# Altium PCB Steering_Wheel_Board2.PcbDoc
Units mil, origin at the board's own origin, x right, y up, seen from the top; angles counter-clockwise.
Board outline 5320.36 x 2945.22 mil, 2 copper layers (Top Layer, Bottom Layer); 40 components, 35 nets, 200 pads, 60 vias.
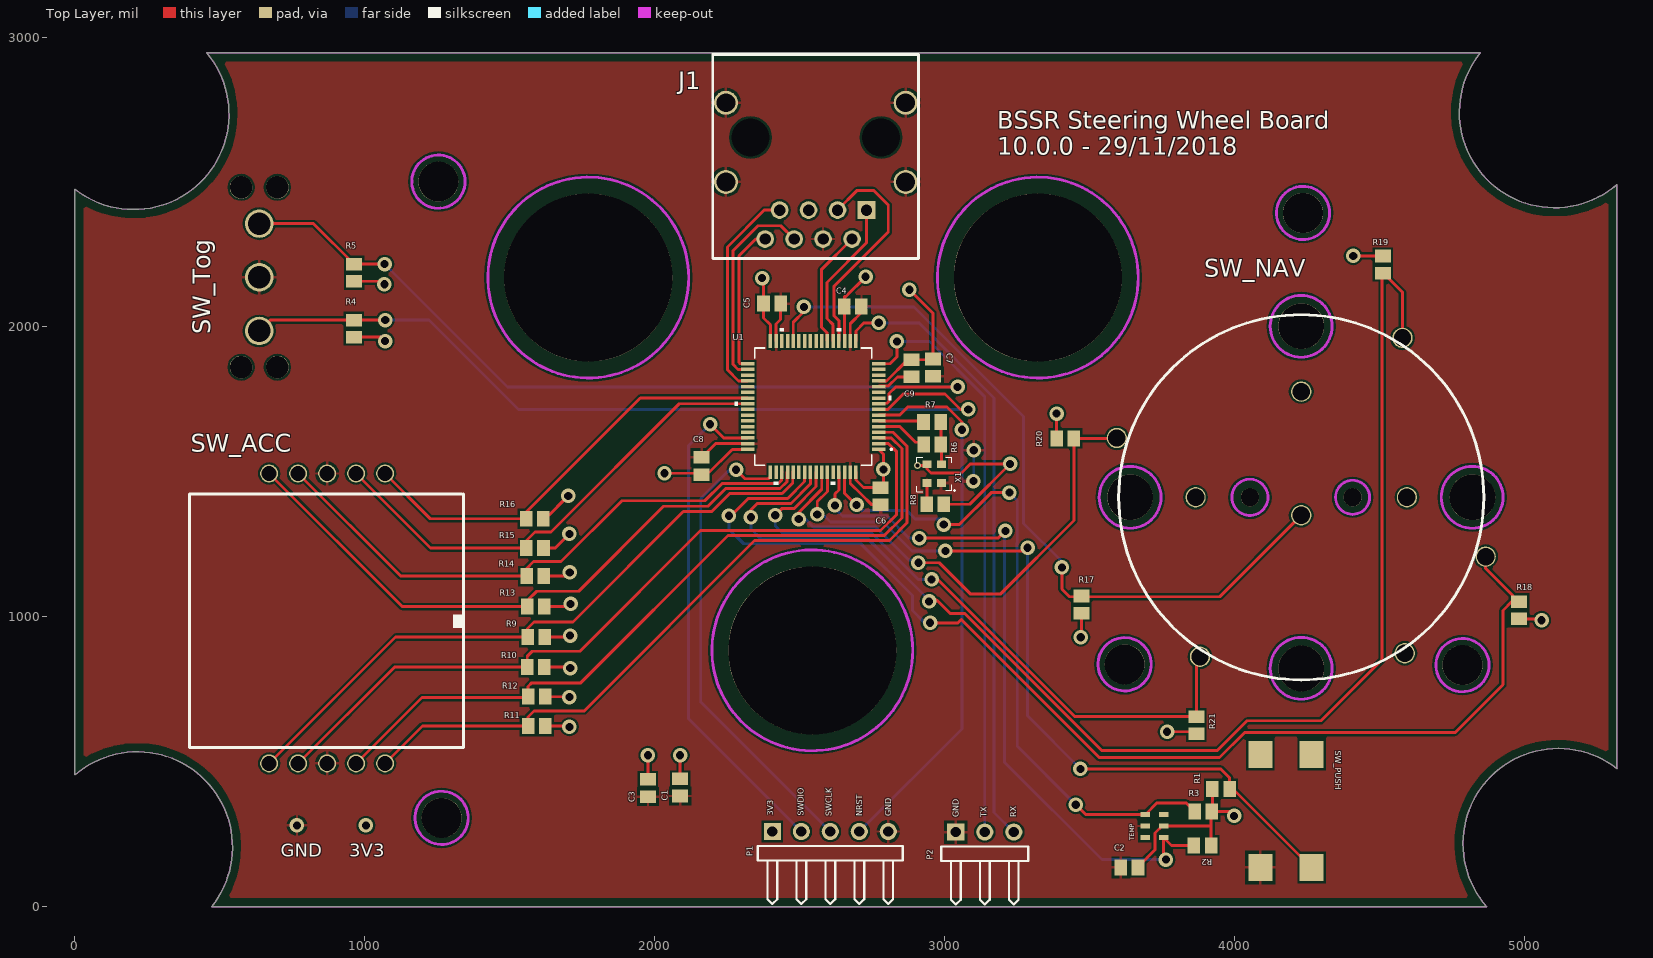
[diagram p0: Top Layer view]
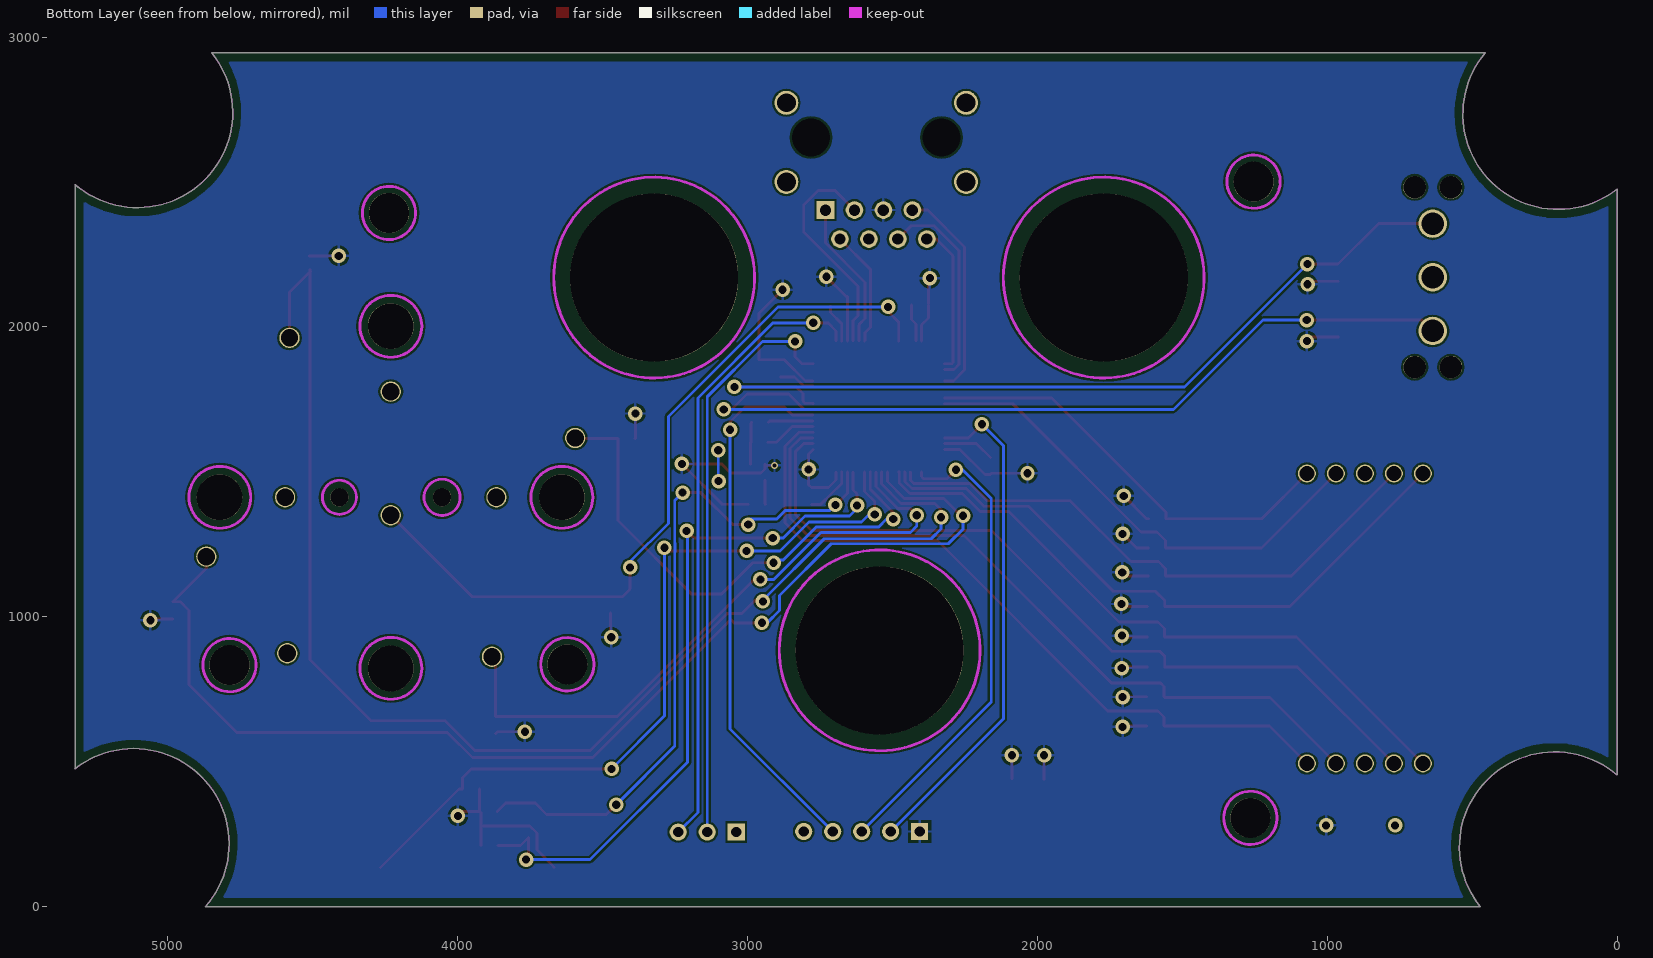
[diagram p1: Bottom Layer view, seen from below]

## Layer stack, top to bottom
Top Solder: solder mask 0.4, Solder Resist, Dk 3.5
Top Layer: signal copper 1.4
Dielectric 1: dielectric 12.6, FR-4, Dk 4.8
Bottom Layer: signal copper 1.4
Bottom Solder: solder mask 0.4, Solder Resist, Dk 3.5

## Board outline
0,454.31 0,2475 ccw(c202.93,2733.74) 454.95,2944.95 455,2945 4848.03,2945 4847.95,2945.06 ccw(c5105,2740) 5319.41,2490.69 5320,2490.69 5320,475 5320.36,475.31 ccw(c5117.43,216.58) 4870,0 471.97,0 471.97,-0.16 ccw(c215,205)

## Design rules (kind name [scope] priority, off if disabled: settings)
BoardOutlineClearance [All] p1: gap=10 ignorepadtopadclearanceinfootprint=FALSE except(0: Arc-SplitContinuation Track-SplitContinuation SMDPad-SplitContinuation THPad-SplitContinuation Via-SplitContinuation Fill-SplitContinuation Poly-SplitContinuation Region-SplitContinuation Text-OutlineEdge Text-SplitContinuation; 30: Poly-OutlineEdge Poly-CutoutEdge)
Clearance [All] p1: gap=7 ignorepadtopadclearanceinfootprint=FALSE
HoleSize [All] p1: absolutevalues=TRUE maxlimit=1500 minlimit=1 maxpercent=80.000 minpercent=20.000
MinimumSolderMaskSliver [All] p1: minsoldermaskwidth=6
PolygonConnect [All] p1: connectstyle=Relief reliefconductorwidth=10 reliefentries=4 polygonreliefangle="90 Angle" airgapwidth=10
RoutingVias [All] p1: holewidth=28 width=50 viastyle="Through Hole" minholewidth=28 minwidth=50 maxholewidth=28 maxwidth=50
SolderMaskExpansion [All] p1: expansion=4
Width [All] p1: maxlimit=10 minlimit=10 preferedwidth=10
28 further rules are at their usual default settings.

## Components (designator, comment, footprint, x,y, rotation, side; value= is the part's Value field where it differs from the comment)
C1 "Cap" C0805 2088,411 r90 top value=0.1µF
C2 "Cap" C0805 3638,135 r0 top value=0.1µF
C3 "Cap" C0805 1977,409 r90 top value=10µF
C4 "Cap" C0805 2684,2071 r180 top value=100nF
C5 "Cap" C0805 2405,2080 r180 top value=100nF
C6 "Cap" C0805 2779.67,1416 r90 top value=100nF
C7 "Cap" C0805 2960,1859.53 r90 top value=1µF
C8 "Cap" C0805 2162,1520 r270 top value=100nF
C9 "Cap" C0805 2886,1857 r90 top value=10nF
J1 "5555153-1" "RJ45 - CHN + DIGIKEY" 2561,2573 r180 top
P1 "Header 5H" HDR1X5H 2406,259 r0 top
P2 "Header 3H" HDR1X3H 3039,257 r0 top
R1 "Res" C0805 3954,406 r0 top value=100k
R2 "Res" C0805 3890,211 r180 top value=10k
R3 "Res" C0805 3893,328 r180 top value=10k
R4 "Res" C0805 962,1994 r90 top value=100k
R5 "Res" C0805 963,2187 r270 top value=100k
R6 "Res" C0805 2958.29,1594 r0 top value=0k
R7 "Res" C0805 2957,1671 r0 top value=0k
R8 "Res" C0805 2968,1388 r0 top value=10k
R9 "Res" C0805 1591,930 r180 top value=100k
R10 "Res" C0805 1590,826 r180 top value=100k
R11 "Res" C0805 1593,623 r0 top value=100k
R12 "Res" C0805 1593,724 r0 top value=100k
R13 "Res" C0805 1590,1035 r0 top value=100k
R14 "Res" C0805 1588,1140 r0 top value=100k
R15 "Res" C0805 1587,1237 r180 top value=100k
R16 "Res" C0805 1586,1338 r180 top value=100k
R17 "Res" C0805 3472,1042 r90 top value=100k
R18 "Res" C0805 4982,1022 r90 top value=100k
R19 "Res" C0805 4512,2215 r270 top value=100k
R20 "Res" C0805 3417,1615 r0 top value=100k
R21 "Res" C0805 3869,626 r90 top value=100k
SW_ACC "EAW0J-B24-CE0128L" EAW0J-B24-CE0128L 1070,1494 r180 top (schematic designator EAW1)
SW_NAV "Comment" TSWB3NCB222LFS 4230.83,1412 r0 top
SW_PUSH "K12SCS1.55NOLFTX" Pushbutton 4177.99,329.88 r0 top (schematic designator K1)
SW_Tog "SW-SPDT" 3POSSPDT 636,2171 r0 top (schematic designator S1)
TEMP "Temp_Sensor" Temp_Sensor 3724.5,278 r0 top (schematic designator 1)
U1 "STM32L4x6RxT6" LQFP64-10x10mm 2547,1725 r180 top value=Value
X1 "DSC6011" DSC6011JE1A-020.0000TCT-ND 3024.61,1435.65 r90 top (schematic designator DSC1)

## Footprints (in the part's own frame and the unit in brackets; to place one, negate y for a bottom-side part, rotate by r counter-clockwise, add the part's x,y. Pads: shape width x height; smd on the part's side, far side on the other; paste and mask are expansions set on the pad)
3POSSPDT [mil] "100SP3T2B4M2QE-ND"
  round 98 hole 78: 1(0,185.04) 2(0,0) 3(0,-185.04)
  round 78 hole 78: ""(-62.6,310.04) ""(-62.6,-310.04) ""(62.6,-310.04) ""(62.6,310.04)
C0805 [mm] "Chip Capacitor, Body 2.0x1.3mm, IPC High Density"
  rect 1.1x1.4 smd: 1(-0.75,0) 2(0.75,0)
  body extent -1.1,-0.72 1.1,0.72, height 1.4
DSC6011JE1A-020.0000TCT-ND [mm] "4-Lead Very Thin Land Grid Array (AUA) - 2.5x2.0 mm Body [VLGA]"
  rect 0.7x0.8 smd: 1(0.645,2.149) 2(0.645,0.899) 3(2.295,0.899) 4(2.295,2.149)
  silkscreen extent -0.13,-0.25 2.92,3.05, body extent 0.27,0.27 2.67,2.77, height 0.89
EAW0J-B24-CE0128L [mil] "ROTARY ENCODER MECHANICAL 128PPR"
  round 62 hole 52: 1(0,0) 2(100,0) 3(300,0) 4(400,0) 5(400,1000) 6(300,1000) 7(100,1000) 8(0,1000) C(200,1000) C(200,0)
  silkscreen extent -270,70 675,945
HDR1X3H [mm] "Connector; Header; 3 Position; Right Angle"
  rect 1.5x1.5 hole 0.9: 1(0,0)
  round 1.5 hole 0.9: 2(2.54,0) 3(5.08,0)
  silkscreen extent -1.27,-6.35 6.35,-1.27
HDR1X5H [mm] "Connector; Header; 5 Position; Right Angle"
  rect 1.5x1.5 hole 0.9: 1(0,0)
  round 1.5 hole 0.9: 2(2.54,0) 3(5.08,0) 4(7.62,0) 5(10.16,0)
  silkscreen extent -1.27,-6.35 11.43,-1.27
LQFP64-10x10mm [mil]
  rect 47x12 smd paste+0 mask+0: 1(-226.38,147.64) 2(-226.38,127.95) 3(-226.38,108.27) 4(-226.38,88.58) 5(-226.38,68.9) 6(-226.38,49.21) 7(-226.38,29.53) 8(-226.38,9.84) 9(-226.38,-9.84) 10(-226.38,-29.53) 11(-226.38,-49.21) 12(-226.38,-68.9) 13(-226.38,-88.58) 14(-226.38,-108.27) 15(-226.38,-127.95) 16(-226.38,-147.64) 33(226.38,-147.64) 34(226.38,-127.95) 35(226.38,-108.27) 36(226.38,-88.58) 37(226.38,-68.9) 38(226.38,-49.21) 39(226.38,-29.53) 40(226.38,-9.84) 41(226.38,9.84) 42(226.38,29.53) 43(226.38,49.21) 44(226.38,68.9) 45(226.38,88.58) 46(226.38,108.27) 47(226.38,127.95) 48(226.38,147.64)
  rect 12x47 smd paste+0 mask+0: 17(-147.64,-226.38) 18(-127.95,-226.38) 19(-108.27,-226.38) 20(-88.58,-226.38) 21(-68.9,-226.38) 22(-49.21,-226.38) 23(-29.53,-226.38) 24(-9.84,-226.38) 25(9.84,-226.38) 26(29.53,-226.38) 27(49.21,-226.38) 28(68.9,-226.38) 29(88.58,-226.38) 30(108.27,-226.38) 31(127.95,-226.38) 32(147.64,-226.38) 49(147.64,226.38) 50(127.95,226.38) 51(108.27,226.38) 52(88.58,226.38) 53(68.9,226.38) 54(49.21,226.38) 55(29.53,226.38) 56(9.84,226.38) 57(-9.84,226.38) 58(-29.53,226.38) 59(-49.21,226.38) 60(-68.9,226.38) 61(-88.58,226.38) 62(-108.27,226.38) 63(-127.95,226.38) 64(-147.64,226.38)
  silkscreen extent -273,-270 270,270, body extent 0,0 10,10, height 10
Pushbutton [mm] "K12SCS1.55NOLFTX"
  rect 2.1x2.4 smd: 1(-2.25,-4.95) 2(2.25,-4.95) 3(2.25,4.95) 4(-2.25,4.95)
"RJ45 - CHN + DIGIKEY" [mm]
  rect 1.55x1.55 hole 1: 1(-4.318,4.318)
  round 1.55 hole 1: 2(-3.048,6.858) 3(-1.778,4.318) 4(-0.508,6.858) 5(0.762,4.318) 6(2.032,6.858) 7(3.302,4.318) 8(4.572,6.858)
  round 2.1 hole 1.65: 11(-7.747,-5.08) 11(-7.747,1.854) 12(8.001,-5.08) 12(8.001,1.854)
  round 1.524 hole 3.35: ""(-5.588,-2.032) ""(5.842,-2.032)
  silkscreen extent -8.87,-9.32 9.16,8.57
Temp_Sensor [mm] "Si7000-A20 Temperature and Humidity Sensor"
  rect 0.85x0.45 smd: 1(-0.8,1) 2(-0.8,0) 3(-0.8,-1) 4(0.8,1) 5(0.8,0) 6(0.8,-1)
TSWB3NCB222LFS [mm] "SWITCH NAVIGATION SCROLL"
  round 1.778 hole 1.524: 1(0,-1.57) 2(16.16,-5.2) 3(8.87,13.97) 4(-16.16,5.2) 5(-8.87,-13.97) 11(-9.26,0) 12(9.07,-13.67) 21(9.26,0) 22(0,9.26)
  round 4 hole 4: ""(-15,0) ""(0,-15) ""(0,15) ""(15,0)
  round 1.6 hole 1.6: ""(-4.5,0) ""(4.5,0)
  Keep-Out Layer circle w0.254: c-4.5,0 r1.584
  Keep-Out Layer circle w0.254: c4.5,0 r1.491
  Keep-Out Layer circle w0.254: c-0.014,-14.986 r2.709
  Keep-Out Layer circle w0.254: c14.972,0 r2.709
  Keep-Out Layer circle w0.254: c-0.014,14.986 r2.709
  Keep-Out Layer circle w0.254: c-15,0 r2.709
  silkscreen extent -16,-16 16,16

## Part data
C1 C2 C3 C4 C5 C6 C7 C8 C9: "Capacitor", LatestRevisionDate=17-Jul-2002, LatestRevisionNote="Re-released for DXP Platform.", PackageReference=RAD-0.3, Published=8-Jun-2000, Publisher="Altium Limited"
J1: library part CMP-2000-05640-1, "RJ45 Connector, Pitch 1.27 mm, 8 Position, Height 13.08 mm, Tail Length 3.81 mm, -40 to 85 degC, RoHS, Tray", LED Color=DoesNotContainLED, Manufacturer="TE Connectivity", Operating Temperature=-40°C~85°C, Package Description="RJ45 Connector, Pitch 1.27 mm, 8 Position, Height 13.08 mm, Tail Length 3.81 mm", Ratings=Cat3, Standard Package=136, 3D Model=5555153-1.pdf, Catalog Drawings="JackSideEntryRightAngle /  / JackSideEntryRightAngleTop", Category=Connectors,Interconnects, Connector Type=Jack, Contact Finish=Gold, Contact Finish Thickness=50µin(1.27µm), Contact Material=PhosphorBronze, Datasheet URL=http://www.te.com/commerce/DocumentDelivery/DDEController?Action=srchrtrv&DocNm=5555153&DocType=Customer+Drawing&DocLang=English&DocFormat=pdf&PartCntxt=5555153-1, Datasheet Version="Rev. D2, 05/2016", Dynamic Catalog=ModularJacks, Family=ModularConnectors-Jacks, Features=BoardLock,PanelStops, Housing Material=PolybutyleneTerephthalate(PBT),Polyester, Manufacturer URL=http://www.te.com/, Mounting Technology=ThroughHole, Mounting Type=ThroughHole, Number of Ports=1, Number of Positions/Contacts=8p8c(RJ45,Ethernet), Number of Rows=1, Orientation=90°Angle(Right), Other Names=A31438, Package Reference=5555153-1, Packaging=Tray, RoHS Information=5555153-1StatementofCompliance, Shielding=Shielded, Tab Direction=Down, Termination=Solder
P1: "Header, 5-Pin, Right Angle", LatestRevisionDate=17-Jul-2002, LatestRevisionNote="Re-released for DXP Platform.", Publisher="Altium Limited"
P2: "Header, 3-Pin, Right Angle", LatestRevisionDate=17-Jul-2002, LatestRevisionNote="Re-released for DXP Platform.", Publisher="Altium Limited"
R1 R4 R5 R6 R7 R9 R10 R11 R12 R13 R14 R15 R16 R17 R18 R19 R20 R21: "Rectangular Thick Film Chip Resistor, 10 Ohm to 1M Ohm Range, 0.1% and 0.5% Tolerance, 0805 Size, 0.1 W", PackageDocument=Mar-2003, Code_IPC="2012 [0805]", ComponentLink1Description="Manufacturer Link", ComponentLink1URL=http://www.panasonic.com/industrial/components/resistive_products.htm, ComponentLink2Description=Datasheet, ComponentLink2URL=http://www.panasonic.com/industrial/components/pdf/AOA0000CE8.pdf, LatestRevisionDate=19-Mar-2004, LatestRevisionNote="Silkscreen size reduced.", Note="If flow soldering, adjust pad width of PCB Footprint to 0.7 - 0.8 times the width of the resistor.", PackageReference=ERA-0805, Published=17-Dec-2003, Publisher="Altium Limited"
R2 R3 R8: PackageDocument=Mar-2003, Code_IPC="2012 [0805]", LatestRevisionDate=19-Mar-2004, LatestRevisionNote="Silkscreen size reduced.", Note="If flow soldering, adjust pad width of PCB Footprint to 0.7 - 0.8 times the width of the resistor.", PackageReference=ERA-0805, Published=17-Dec-2003, Publisher="Altium Limited"
SW_ACC: "Rotary Encoder - 8 pins"
SW_PUSH: library part Pushbutton, "Pushbutton"
SW_Tog: "SPDT Subminiature Toggle Switch, Right Angle Mounting, Vertical Actuation", ComponentLink1Description="Manufacturer Link", ComponentLink1URL=http://www.apem.com, DatasheetVersion=05-Dec-2000, LatestRevisionDate=17-Dec-2003, LatestRevisionNote="Schematic revised, PCB Footprint replaced.", PackageDescription="Switch; 4 Leads", PackageReference=TL36WW15050, Published=24-Mar-1999, Publisher="Altium Limited"
TEMP: "Si7000-A20 Temperature and Humidity Sensor"
U1: "Imported", Manufacturer_Part_Number=stm32l4x6rxt6, C="Copyright (C) 2016 Accelerated Designs. All rights reserved", Copyright="Copyright (C) 2016 Accelerated Designs. All rights reserved", RefDes=RefDes, Type=DEV, Vendor=STMicroelectronics

## Free pads (board coordinates)
  round 580 hole 580: 1(1771,2170) 2(2544,884) 3(3322,2170)
  round 138 hole 138: ""(1254,2501) ""(1265,306) ""(3621.53,836) ""(4237,2393) ""(4787,833)

## Via types
v1: diameter 50, hole 28, Top Layer to Bottom Layer, 59 vias
v2: diameter 25, hole 14, Top Layer to Bottom Layer, 1 vias

## Nets (pads, with @x,y where several pads share a name; then routed paths per layer and width w, separated by ;. In a path a pad name is that pad's centre, name@x,y a point inside that pad or via, vN(x,y) a via of type N, cw(c..) or ccw(c..) an arc to the next point about the centre after c; other vN are vias at no path point)
3V3: C1.2 C2.2 C3.2 C4.2 C5.2 C6.2 C7.2 C8.2 C9.2 J1.5 P1.1 R1.1 R2.1 R3.1 R4.1 R5.2 R8.2 R9.1 R10.1 R11.2 R12.2 R13.2 R14.2 R15.1 R16.1 R17.1 R18.1 R19.1 R20.1 R21.1 TEMP.5 U1.1 U1.13 U1.19 U1.32 U1.48 U1.64 X1.4 | length 4435.5
  Top Layer w10: R4.1 1056.53,1964.47 v1(1070,1951) ; R5.2 1057.53,2157.47 v1(1068,2147) ; R16.1 1623,1338 v1(1702,1417) ; R15.1 1657,1237 v1(1706,1286) ; R14.2 1694,1140 v1(1707,1153) ; R10.1 1706,826 v1(1709,823) ; R13.2 1701,1035 v1(1710,1044) ; R9.1 1703,930 v1(1708,935) ; R11.2 1703,623 v1(1706,620) ; R12.2 1705,724 v1(1706,723) ; C3.2 v1(1977,522) ; v1(2034,1495) 2157.47,1495 C8.2 2181.11,1490.47 2268,1577.36 U1.48 ; C1.2 v1(2088,522) ; v1(2371,2168) 2375.47,2163.53 C5.2 ; C5.2@2375.47,2075 2375.47,2030.89 2399.36,2007 U1.32 ; U1.19 C4.2 2654.47,2104.47 2659.47,2104.47 v1(2728,2173) ; U1.64 2694.64,1471.89 2721,1445.53 C6.2 2789,1454.86 v1(2789,1508) 2789,1561.74 U1.1 ; U1.13 2800.16,1813.58 2873.11,1886.53 C9.2 C7.2@2960,1886.53 ; v1(2879,2128) 2960,2047 C7.2 ; v2(2907,1522) 2936,1522 X1.4 2940,1510 2953.83,1496.17 3058.17,1496.17 3089,1527 v1(3226,1527) 3087,1388 R8.2 ; v1(3387,1701) 3387,1615.47 R20.1 ; v1(3470,929) 3472,931 R17.1 ; C2.2 3667.53,137 3726.53,196 3726.53,253.53 3751,278 TEMP.5 3918.53,278 3919.53,277 ; v1(3768,603) 3862.47,603 R21.1 ; R2.1 3919.53,277 ; R1.1 3924.47,329.94 R3.1 ; v1(3999,313) 3984,328 R3.1 ; v1(4410,2245) 4511.53,2245 R19.1 ; R18.1 5055.53,992.47 v1(5060,988) ; 3919.53,277 3919.53,325 R3.1
  other v1: 1004,280
ACC1: R16.2 SW_ACC.1 U1.39 | length 1500.9
  Top Layer w10: SW_ACC.1 1226,1338 R16.2 1556.47,1360.47 1950.53,1754.53 U1.39
ACC2: R15.2 SW_ACC.2 U1.40 | length 1678.2
  Top Layer w10: SW_ACC.2 1227,1237 R15.2 1557.47,1262.47 1587,1292 1642,1292 2084.84,1734.84 U1.40
ACC3: R14.1 SW_ACC.3 U1.51 | length 1995.1
  Top Layer w10: SW_ACC.3 1124,1140 R14.1 1558.47,1166.47 1582,1190 1677,1190 1887,1400 2173,1400 2232,1459 2425.9,1459 2437.05,1470.15 2437.05,1496.94 U1.51
ACC4: R13.1 SW_ACC.4 U1.52 | length 2201.8
  Top Layer w10: SW_ACC.4 1129,1035 R13.1 1560.47,1055.47 1593,1088 1738,1088 2031,1381 2184,1381 2245,1442 2432.94,1442 2456.73,1465.8 2456.73,1498.62 U1.52
ACC5: R9.2 SW_ACC.5 U1.53 | length 2263.3
  Top Layer w10: SW_ACC.5 1106,930 R9.2 1561.47,959.47 1584,982 1718,982 2099,1363 2197,1363 2259,1425 2439.98,1425 2476.42,1461.44 2476.42,1498.62 U1.53
ACC6: R10.2 SW_ACC.6 U1.2 | length 2732.1
  Top Layer w10: SW_ACC.6 1102,826 R10.2 1560.47,863.47 1578,881 1742,881 2158,1297 2779.2,1297 2835,1352.8 2835,1569 2806.95,1597.05 U1.2
ACC7: R12.1 SW_ACC.7 U1.3 | length 2588.5
  Top Layer w10: SW_ACC.7 1197,721 1560.47,721 R12.1 1563.47,759.47 1576,772 1745,772 2253,1280 2792,1280 2853,1341 2853,1580 2816.27,1616.73 U1.3
ACC8: R11.1 SW_ACC.8 U1.4 | length 2544.9
  Top Layer w10: SW_ACC.8 1199,623 R11.1 1563.47,654.47 1584,675 1757,675 2345,1263 2810,1263 2871,1324 2871,1588 2822.58,1636.42 U1.4
CS1: J1.3 U1.20 | length 777.2
  Top Layer w10: J1.3 2699,2471 2755,2471 2806,2420 2806,2327 2619,2140 2619,2038 2635.58,2021.42 U1.20
CS2: J1.8 U1.33 | length 513.5
  Top Layer w10: U1.33 2295.36,1872.64 2291,1877 2291,2245 2349,2303 J1.8
GND: C1.1 C2.1 C3.1 C4.1 C5.1 C6.1 C7.1 C8.1 C9.1 J1.4 J1.11 J1.12 P1.5 P2.1 SW_ACC.C SW_PUSH.1 SW_Tog.2 TEMP.2 U1.12 U1.18 U1.31 U1.47 U1.63 X1.2 | length 851.4
  Top Layer w10: C8.1 2209.52,1597.05 U1.47 ; U1.31 2419.05,2010.05 2434.53,2025.53 C5.1@2434.53,2075 ; U1.63 2674.95,1460.05 2712,1423 2712.33,1423 2748.85,1386.47 C6.1 ; U1.18 2674.95,2011 2713.53,2049.57 C4.1 ; U1.12 2775.06,1795.58 2806.2,1795.58 2838.09,1827.47 C9.1
  Bottom Layer w10: v1(3100,1467.65) 3101,1468.65 v1(3101,1574.36)
  other v1: 766,280
L_SIGNAL: R4.2 SW_Tog.3 U1.8 | length 2941.8
  Top Layer w10: SW_Tog.3 673.57,2023.53 R4.2 v1(1070.53,2023.53) ; U1.8 2804.52,1715.16 2857.36,1768 3002,1768 3055,1715 v1(3082,1715)
  Bottom Layer w10: v1(1070.53,2023.53) 1221.47,2023.53 1530,1715 v1(3082,1715)
NAV1: R17.2 SW_NAV.1 U1.28 | length 2651.2
  Top Layer w10: U1.28 2478.1,2016.1 2515,2053 v1(2515,2069) ; v1(3405,1170) 3405,1095 3431,1069 3949.65,1069 SW_NAV.1
  Bottom Layer w10: v1(2515,2069) 2895,2069 3273,1691 3273,1322 3405,1190 v1(3405,1170)
NAV2: R18.2 SW_NAV.2 U1.55 | length 4056.4
  Top Layer w10: v1(2256,1348.44) 2263.44,1348.44 2323,1408 2459,1408 2517.47,1466.47 U1.55 ; v1(2950,979) 3047,979 3058,990 3534,514 3949,514 4035,600 4761,600 4926.53,765.53 4926.53,1021.68 4956.38,1051.53 R18.2 4867.06,1166.47 SW_NAV.2
  Bottom Layer w10: v1(2256,1348.44) 2256,1303 2307.1,1251.9 2711.1,1251.9 2890,1073 2890,1021 2932,979 v1(2950,979)
NAV3: R19.2 SW_NAV.3 U1.56 | length 4584.3
  Top Layer w10: v1(2332,1343) 2332,1369 2354,1391 2470,1391 2537.16,1458.16 U1.56 U1.56@2537,1498.46 ; v1(2946.82,1053) 2968,1053 2973,1058 3020,1011 3069.96,1011 3541.96,539 3942,539 4044,641 4298.62,641 4510,852.38 R19.2@4510,2189.53 ; R19.2@4507.53,2192 R19.2@4510,2189.53 ; R19.2@4510,2197 R19.2@4510,2189.53 ; SW_NAV.3 4580.05,2119.48 R19.2@4510,2189.53
  Bottom Layer w10: v1(2332,1343) 2332,1303 2366.1,1268.9 2735.1,1268.9 2946.82,1057.18 v1(2946.82,1053)
NAV4: R21.2 SW_NAV.5 U1.57 | length 2205.6
  Top Layer w10: v1(2416,1350) 2440,1374 2482,1374 2556.84,1448.84 U1.57 ; v1(2955.18,1129) 2976,1129 3449.47,655.53 R21.2 3869,849.38 SW_NAV.5
  Bottom Layer w10: v1(2416,1350) 2416,1313 2438,1291 2747,1291 2909,1129 v1(2955.18,1129)
NAV5: R20.2 SW_NAV.4 U1.58 | length 1787.8
  Top Layer w10: v1(2497,1337) 2497,1360 2576.53,1439.53 U1.58 ; v1(2910,1186.14) 2981.86,1186.14 3089,1079 3194,1079 3446.53,1331.53 R20.2 3592.89,1615 SW_NAV.4
  Bottom Layer w10: v1(2497,1337) 2520,1337 2547,1310 2763,1310 2878,1195 2901.14,1195 v1(2910,1186.14)
Net1_1: R3.2 TEMP.1 U1.62 | length 2365.2
  Top Layer w10: U1.62 2655.27,1425.73 2695,1386 v1(2697,1386) ; v1(2997.56,1318) 3051,1318 3161,1428 v1(3224,1428) ; v1(3453,351.47) 3487.1,317.37 TEMP.1 3733.63,358 3833.47,358 R3.2
  Bottom Layer w10: v1(2697,1386) 2716,1367 2869,1367 2899,1337 2990,1337 2997.56,1329.44 v1(2997.56,1318) ; v1(3224,1428) 3250.84,1401.16 3250.84,1254.16 ; v1(3453,351.47) 3251,553.47 3251,1221.67 3250,1222.67 3250,1253.33 3250.84,1254.16 ; 3250.84,1254.16 3251,1254.33 3251,1254 3250.84,1254.16
Net1_6: R2.2 TEMP.6 U1.61 | length 2450
  Top Layer w10: v1(2622,1384) 2622,1424 2635.58,1437.58 U1.61 ; v1(2913,1271) 3185,1271 v1(3210,1296) ; v1@3757,171 3755.99,172.01 TEMP.6 3783.62,211 R2.2
  Bottom Layer w10: v1(2622,1384) 2622,1373 2648,1347 2802,1347 2878,1271 v1(2913,1271) ; v1@3207,1296 3207,498 3543,162 v1(3764,162)
NetDSC1_1: R8.1 X1.1 | length 83.6
  Top Layer w10: R8.1 2940,1389.53 X1.1@2940,1471
NetDSC1_3: R6.2 R7.2 X1.3 | length 146.1
  Top Layer w10: R7.2 2988.53,1669 2988.53,1602 2989.21,1601.32 X1.3
NetK1_2: R1.2 SW_PUSH.2 U1.59 | length 2742.3
  Top Layer w10: v1(2561,1353) 2561,1397 2596.21,1432.21 U1.59 ; v1(3003,1227) 3276,1227 v1(3287,1238) ; v1(3469,475) 3953,475 3983.53,444.47 R1.2 3995.57,406 SW_PUSH.2
  Bottom Layer w10: v1(2561,1353) 2581,1353 2607,1327 2788,1327 2888,1227 v1(3003,1227) ; v1(3287,1238) 3287,657 v1(3469,475)
NRST: P1.4 U1.7 | length 1878.8
  Top Layer w10: U1.7 2845.47,1695.47 2873,1723 3009,1723 3060,1672 v1(3060,1645)
  Bottom Layer w10: P1.4 3060,613 v1(3060,1645)
OSC_IN: R6.1 U1.5 | length 178.5
  Top Layer w10: U1.5 2845.9,1656.1 2900,1602 R6.1@2929.47,1602
OSC_OUT: R7.1 U1.6 | length 156.1
  Top Layer w10: U1.6 2922.69,1675.79 R7.1
R_SIGNAL: R5.1 SW_Tog.1 U1.9 | length 2953.7
  Top Layer w10: SW_Tog.1 823.49,2356.04 R5.1 v1(1068.53,2216.53) ; U1.9 2775.06,1736.53 2801.85,1736.53 2808.88,1743.56 2808.88,1770.34 2831.54,1793 v1(3045,1793)
  Bottom Layer w10: v1(1068.53,2216.53) 1492.03,1793.03 ; 1492,1793 v1(3045,1793)
RX: P2.3 U1.17 | length 2156.1
  Top Layer w10: U1.17 2694.64,1986.11 2722.53,2014 v1(2773,2014)
  Bottom Layer w10: v1(2773,2014) 2912,2014 3171,1755 3171,325 P2.3
SCK1: J1.1 U1.21 | length 517
  Top Layer w10: U1.21 2615.9,2007.1 2594.53,2028.47 2594.53,2153.53 2731,2290 J1.1
SCK2: J1.6 U1.34 | length 714.4
  Top Layer w10: U1.34 2288.05,1852.95 2271,1870 2271,2263 2357,2349 2435,2349 J1.6
SDI1: J1.2 U1.22 | length 404.3
  Top Layer w10: U1.22 2594.53,1953.06 2594.53,1979.85 2575,1999.38 2575,2197 J1.2
SDO2: J1.7 U1.36 | length 742.1
  Top Layer w10: U1.36 2289.42,1813.58 2251,1852 2251,2276 2378,2403 J1.7
SWCLK: P1.3 U1.49 | length 1648.7
  Top Layer w10: v1(2281,1507) 2312,1476 2392.07,1476 2399.36,1483.29 U1.49 ; P1.3 P1.3@2606,261
  Bottom Layer w10: v1(2281,1507) 2258,1507 2159,1408 2159,706 P1.3
SWDIO: P1.2 U1.46 | length 1746
  Top Layer w10: v1(2191,1664) 2238.27,1616.73 U1.46
  Bottom Layer w10: v1(2191,1664) 2117,1590 2117,648 P1.2
TX: P2.2 U1.16 | length 2009.8
  Top Layer w10: U1.16 2811.64,1872.64 2836,1897 v1(2836,1950)
  Bottom Layer w10: v1(2836,1950) 2948,1950 3139,1759 P2.2
pads on no net: J1. SW_NAV. SW_NAV.11 SW_NAV.12 SW_NAV.21 SW_NAV.22 SW_PUSH.3 SW_PUSH.4 SW_Tog. TEMP.3 TEMP.4 U1.10 U1.11 U1.14 U1.15 U1.23 U1.24 U1.25 U1.26 U1.27 U1.29 U1.30 U1.35 U1.37 U1.38 U1.41 U1.42 U1.43 U1.44 U1.45 U1.50 U1.54 U1.60

## Polygon pours and split planes (outlines as drawn)
3V3 on Bottom Layer "Bottom Layer-No Net" (solid, remove dead copper, pour order 2): 0,2944.95 0,0 5319.41,0 5319.41,2944.95
no net on Bottom Layer "Bottom Layer-No Net 1" (solid, pour order 0): 737,2848
GND on Top Layer "Top Layer-No Net" (solid, remove dead copper, pour order 8): 0,2945.06 0,0 5319.41,0 5319.41,2945.06
no net on Top Layer "Top Layer-No Net 1" (solid, pour order 4): 741,2839

## Keep-outs
Keep-Out Layer:
  circle w10: c2544,884 r346.55
  circle w10: c3322,2170 r346.55
  circle w10: c1771,2170 r346.55
  circle w10: c4237,2393 r91.92
  circle w10: c4787,833 r91.92
  circle w10: c1254,2501 r91.92
  circle w10: c3621.53,836 r91.92
  circle w10: c1265,306 r91.92
  lines w3: 0,454.31 0,2475 ccw(c202.93,2733.74) 454.95,2944.95 ; 0.59,454.31 cw(c215,205) 471.97,-0.16 ; 455,2945 4848.03,2945 ; 471.97,0 4870,0 cw(c5117.43,216.58) 5319.97,475.62 ; 4847.95,2945.06 ccw(c5105,2740) 5319.9,2491.12 ; 5320,475.65 5320,2491.12

## Other copper
Top Layer:
  pour cut-out: 2433,2438

## Silkscreen, mask and mechanical layers (free items; w line width, h text height)
Top Overlay:
  text "BSSR Steering Wheel Board / 10.0.0 - 29/11/2018" at 3182,2593 h60
  text "3V3" at 2410,313 h20 r90
  text "SWDIO" at 2514,313 h20 r90
  text "NRST" at 2716,312 h20 r90
  text "SWCLK" at 2611,311 h20 r90
  text "GND" at 2817,311 h20 r90
  text "GND" at 3049,308 h20 r90
  text "TX" at 3145,308 h20 r90
  text "RX" at 3248,308 h20 r90
  text "GND" at 710,172 h45
  text "3V3" at 946,172 h45

## Dimensions
454.95,2944.95 to 471.97,-0.16 on Drill Drawing
0.59,454.31 to 5319.97,475.62 on Drill Drawing